# EAGLE board Diagrama de Circuito (EAGLE 7.6.0)

Size 73.58 x 63.39 mm. Coordinates in mm from the lower left corner, seen from the top.
Outline: 0,0 56.82,0 56.82,53.33 0,53.33 0,0
Copper layers (1*16): Top 0.035mm / dielectric 1.5mm / Bottom 0.035mm
Design rules "default": minimum track width 10mil, minimum drill 24mil, track to track 8mil, track to pad 8mil, pad to pad 8mil, via to via 8mil, smd to smd 8mil, copper to edge 40mil, drill to drill 8mil, minimum pad ring 10mil, minimum via ring 8mil, stop-mask expansion 4mil, vias tented up to drill 0mil, thermal gap 10mil

## Footprints (pad centres in the part's own frame; a part is rotated, then mirrored left to right if it is on the bottom)
DC-POWER = drill 0.889 pad 2.54 octagon: + 0,2.54; - 0,-2.54
CR2032H = drill 1.118 pad 2.54 octagon: + 5.08,10.795; +@1 -5.08,10.795; - 0,-6.985
RADIAL-D11.36MM = drill 1.27 pad 1.905 square: + -2.54,0 | drill 1.27 pad 1.905: - 2.54,0
LED5MM = drill 0.813 octagon: A -1.27,0; K 1.27,0
D-7.5 = drill 0.813 long: A 3.81,0; C -3.81,0
M3XXH = drill 1.016 long: 1 -3.81,3.81; 2 -3.81,-3.81; O -6.35,-3.81; P 6.35,-3.81; P@ 6.35,3.81; S -6.35,3.81
0207/10 = drill 0.813 octagon: 1 -5.08,0; 2 5.08,0
M251 = drill 0.813 long: 1 -2.54,0; 2 0,0; 3 2.54,0
TO92 = drill 0.813 octagon: 1 1.27,0; 2 0,1.905; 3 -1.27,0
ARDUINO_UNO = drill 1.016 pad 1.88: 0 63.5,50.8; 1 60.96,50.8; 2 58.42,50.8; 3 55.88,50.8; 3.3V 35.56,2.54; 4 53.34,50.8; 5 50.8,50.8; 5V 38.1,2.54; 6 48.26,50.8; 7 45.72,50.8; 8 41.656,50.8; 9 39.116,50.8; 10 36.576,50.8; 11 34.036,50.8; 12 31.496,50.8; 13 28.956,50.8; A0 50.8,2.54; A1 53.34,2.54; A2 55.88,2.54; A3 58.42,2.54; A4 60.96,2.54; A5 63.5,2.54; AREF 23.876,50.8; GND 26.416,50.8; GND. 43.18,2.54; GND.. 40.64,2.54; I/OREF 30.48,2.54; N/C 27.94,2.54; RESET 33.02,2.54; SCL 18.796,50.8; SDA 21.336,50.8; VIN 45.72,2.54 | hole 3.2: 66.04,7.62; 66.04,35.56; 15.24,50.8; 13.97,2.54

## Placement (x,y rotation side)
BAT5  [DC-POWER]  5,22.78 0 top
BAT6  [CR2032H]  5,35.48 0 top
C2  1uF  [RADIAL-D11.36MM]  5,98.98 0 top  (outside the outline)
D2  [LED5MM]  5,137.08 0 top  (outside the outline)
D18  [D-7.5]  5,60.88 0 top
K1  [M3XXH]  5,86.28 0 top  (outside the outline)
R1  2.2k‎Ω  [0207/10]  5,124.38 0 top  (outside the outline)
R4  1k‎Ω  [0207/10]  5,149.78 0 top  (outside the outline)
R17  10k‎Ω  [0207/10]  5,48.18 0 top
S14  [M251]  5,111.68 0 top  (outside the outline)
T1  [TO92]  5,73.58 0 top  (outside the outline)
U4  [ARDUINO_UNO]  5,10.08 0 top

## Library data of the parts
BAT5 BAT6 C2 D2 D18 K1 R1 R4 R17 S14 T1 U4 = AUTODESK_CIRCUITS_BREADBOARD

## Nets
N$1: D18.C K1.S R1.2 T1.3
N$2: K1.1
N$3: K1.P@
N$4: D18.A K1.2 K1.O K1.P R17.1 U4.5V U4.A1
N$5: BAT5.- BAT6.- C2.+ R4.1 T1.1 U4.GND.
N$6: BAT6.+ BAT6.+@1 R17.2 T1.2 U4.A0
N$7: BAT5.+ S14.2
N$8: S14.3 U4.VIN
N$9: C2.- R1.1 U4.12
N$10: D2.K R4.2
N$11: D2.A U4.4

## Tracks (layer width: path | path; a pad name or v marks a point on that pad's centre or on a via)
N$1  (3 unrouted)
N$4  (6 unrouted)
N$5  (5 unrouted)
N$6  (4 unrouted)
N$7  (1 unrouted)
N$8  (1 unrouted)
N$9  (2 unrouted)
N$10  (1 unrouted)
N$11  (1 unrouted)